# Altium PCB PCB design for light switch.PcbDoc
Units mm, origin at the board's own origin, x right, y up, seen from the top; angles counter-clockwise.
Board outline 81 x 35 mm, 2 copper layers (Top Layer, Bottom Layer); 18 components, 12 nets, 72 pads, 0 vias.
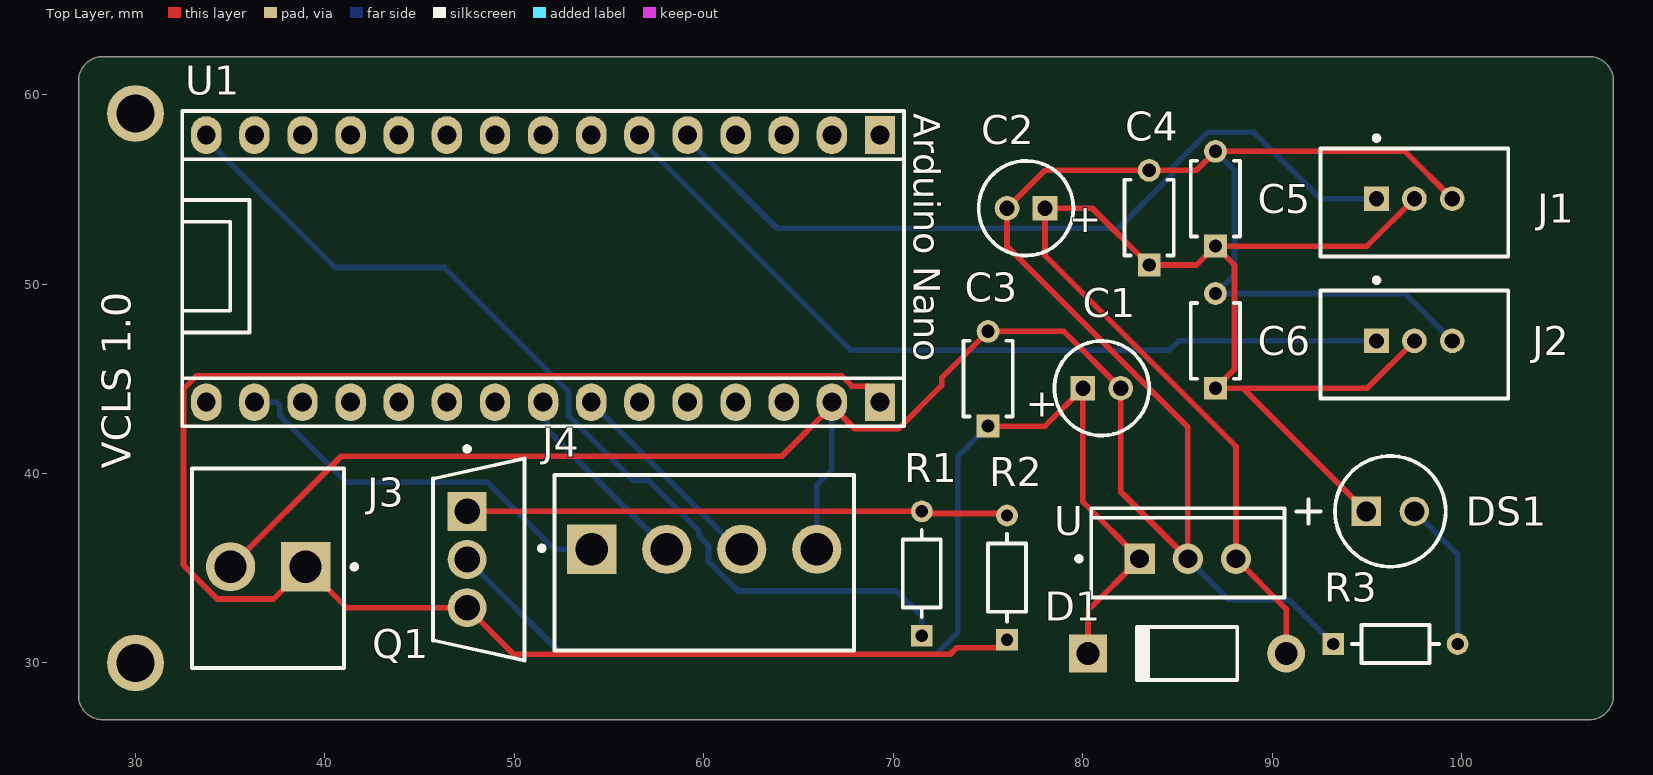
[diagram p0: Top Layer view]
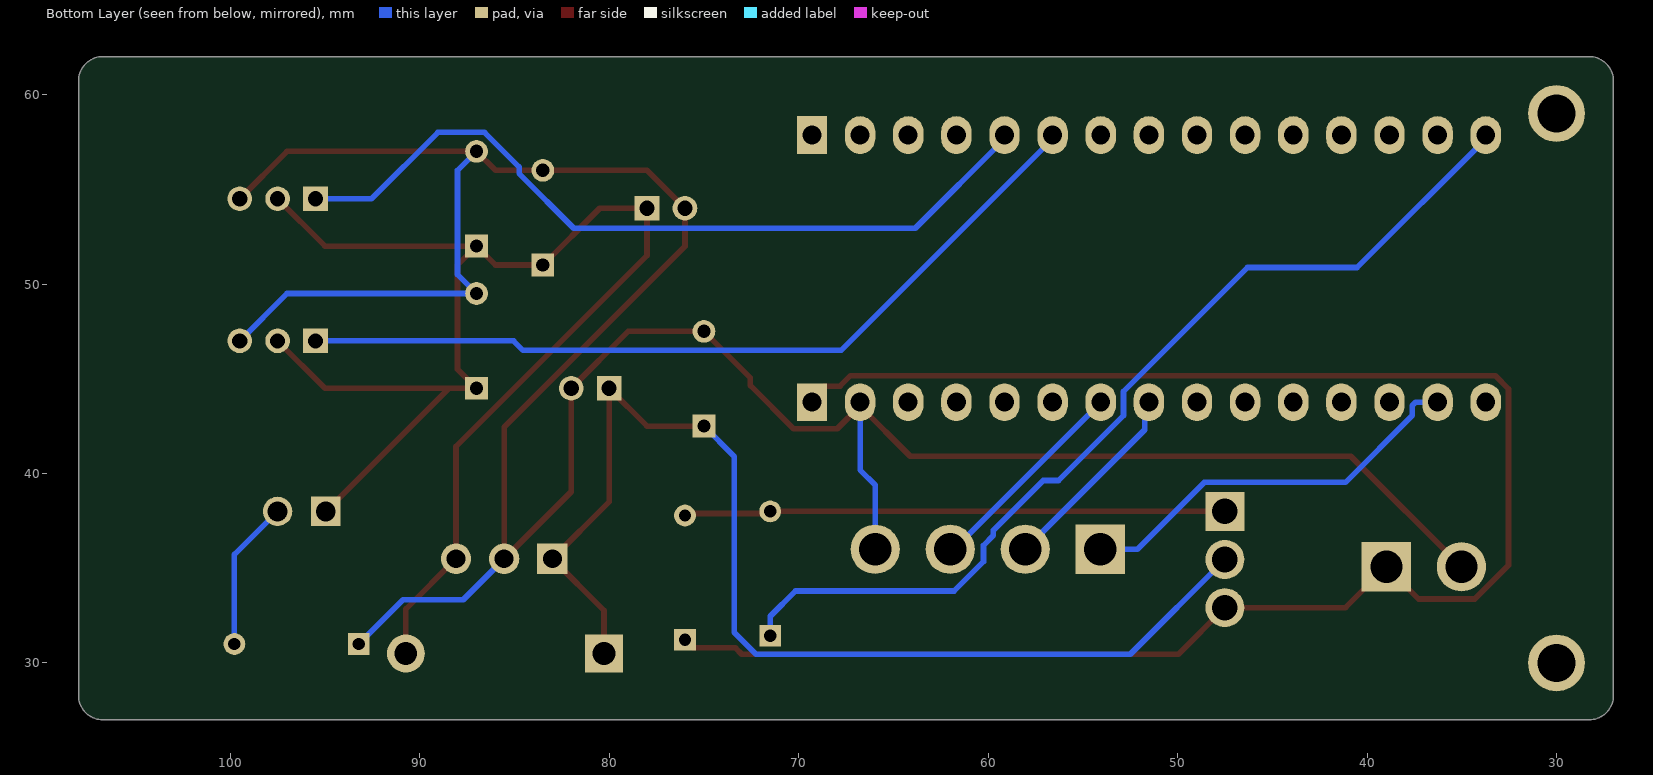
[diagram p1: Bottom Layer view, seen from below]
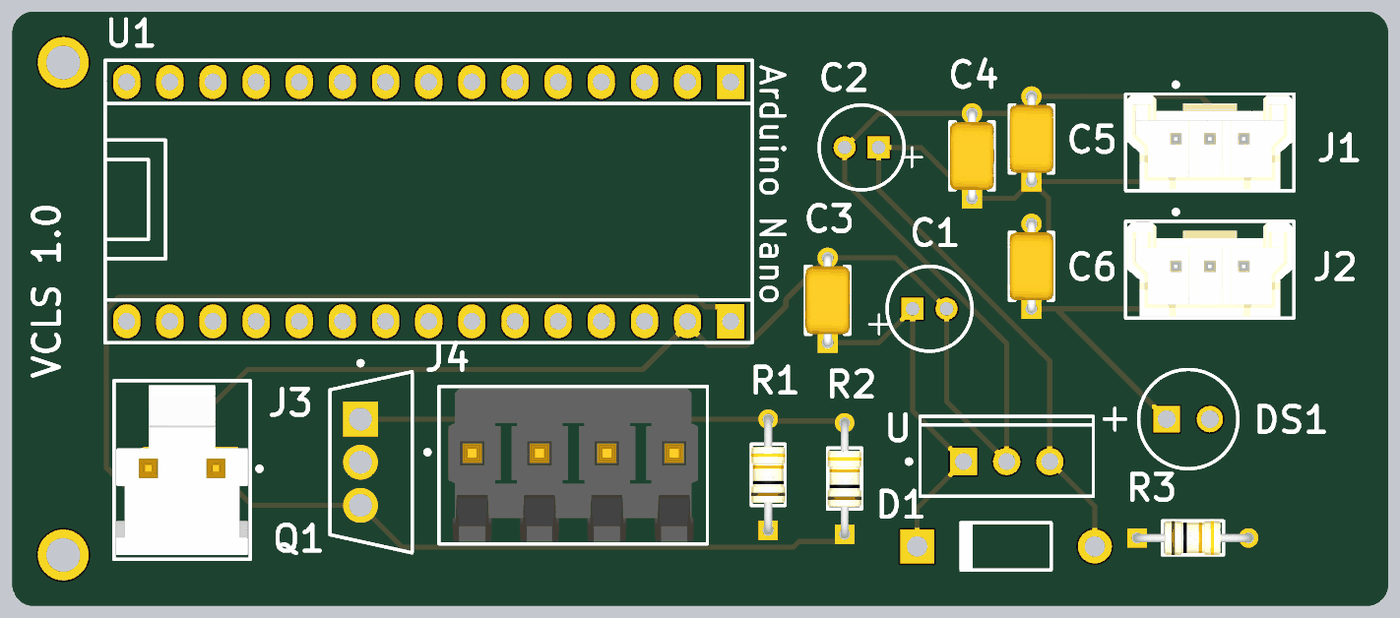
[diagram p2: 3D render of the assembled board from above, using the file's embedded part models]

## Layer stack, top to bottom
Top Solder: solder mask 0.0102, Solder Resist, Dk 3.5
Top Layer: signal copper 0.0356
Dielectric 1: dielectric 0.32, FR-4, Dk 4.8
Bottom Layer: signal copper 0.0356
Bottom Solder: solder mask 0.0102, Solder Resist, Dk 3.5

## Board outline
28.27,27 cw(c28.27,28.27) 27,28.27 27,60.73 cw(c28.27,60.73) 28.27,62 106.73,62 cw(c106.73,60.73) 108,60.73 108,28.27 cw(c106.73,28.27) 106.73,27

## Design rules (kind name [scope] priority, off if disabled: settings)
Clearance [All] p1: gap=0.254 ignorepadtopadclearanceinfootprint=FALSE except(0: Arc-Hole Track-Hole SMDPad-Hole THPad-Hole Via-Hole Fill-Hole Poly-Hole Region-Hole Text-Hole)
ComponentClearance [All] p1: gap=0.13 collisioncheckmode=3 verticalgap=0.13 showdistances=FALSE
PolygonConnect [All] p1: connectstyle=Relief reliefconductorwidth=0.254 reliefentries=4 polygonreliefangle="90 Angle" airgapwidth=0.254
RoutingVias [All] p1: holewidth=0.711 width=1.27 viastyle="Through Hole" minholewidth=0.711 minwidth=1.27 maxholewidth=0.711 maxwidth=1.27
SolderMaskExpansion [All] p1: expansion=0.102 istentingtop=FALSE
Width [All] p1: maxlimit=0.5 minlimit=0.25 preferedwidth=0.3
29 further rules are at their usual default settings.

## Components (designator, comment, footprint, x,y, rotation, side; value= is the part's Value field where it differs from the comment)
C1 "C10" CAPPR55-200-1100X500X1200 81,44.5 r0 top
C2 "C10" CAPPR55-200-1100X500X1200 77,54 r180 top
C3 "C0.1" FP-K15H5-MFG 75,45 r90 top
C4 "C0.1" FP-K15H5-MFG 83.5,53.5 r90 top
C5 "C0.1" FP-K15H5-MFG 87,54.5 r90 top
C6 "C0.1" FP-K15H5-MFG 87,47 r90 top
D1 "Diode 1N4007" DO-41 85.5,30.5 r180 top
DS1 "Led" AVAG-HLMP-3301-2 94.96,38 r0 top
J1 "35362-0350" FP-35362-0350-MFG 97.5,54.3 r180 top
J2 "35362-0350" FP-35362-0350-MFG 97.5,46.8 r180 top
J3 "26-61-4020" FP-26-61-4020-MFG 37,35 r0 top
J4 "26-48-1045" FP-26-48-1045-MFG 60.02,35.29 r180 top
Q1 "AUIRF9540N" FP-TO-220AB-MFG 48.12,35.46 r0 top
R1 "10k Ohm" FP-CF18-MFG 71.5,34.72 r90 top value=10kΩ
R2 "10K Ohm" FP-CF18-MFG 76,34.5 r90 top value=10kΩ
R3 "220 Ohm" FP-CF18-MFG 96.5,31 r0 top value=10kΩ
U "LM7806CT" FAIR-TO-220-3 85.54,35.5 r90 top
U1 "Arduino Nano" PCBComponent_1 50.5,51 r0 top

## Footprints (in the part's own frame and the unit in brackets; to place one, negate y for a bottom-side part, rotate by r counter-clockwise, add the part's x,y. Pads: shape width x height; smd on the part's side, far side on the other; paste and mask are expansions set on the pad)
AVAG-HLMP-3301-2 [mm] "THD, 2-Leads, Body Dia 5.85mm"
  rect 1.55x1.55 hole 1.05: 1(0,0)
  round 1.55 hole 1.05: 2(2.54,0)
  silkscreen extent -3.68,-2.92 4.19,2.92
CAPPR55-200-1100X500X1200 [mm] "THD, 2-Leads, Dia 5mm, Body Length 11mm"
  rect 1.3x1.3 hole 0.8: 1(-1,0)
  round 1.3 hole 0.8: 2(1,0)
  silkscreen extent -2.5,-2.5 2.5,2.5, body extent -2.5,-2.5 2.5,2.5, height 12
DO-41 [mm] "Diode, Axial; Body 5.2 x 2.7 mm (LxDia. max), Lead Dia. 0.86 mm (max)"
  round 2 hole 1.2: 1(-5.23,0)
  rect 2x2 hole 1.2: 2(5.23,0)
  silkscreen extent -2.65,-1.4 2.75,1.4
FAIR-TO-220-3 [mm] "FM, 3-Leads, Body 10.2x4.7mm, Pitch 2.54mm"
  rect 1.6x1.6 hole 1: 1(0,2.54)
  round 1.6 hole 1: 2(0,0) 3(0,-2.54)
  silkscreen extent -2.04,-5.1 2.66,5.87, body extent -2.04,-5.1 2.66,5.1, height 18.95
FP-26-48-1045-MFG [mm]
  rect 2.6x2.6 hole 1.7 paste-1000 mask+0: 1(5.94,-0.71)
  round 2.6 hole 1.7 paste-1000 mask+0: 2(1.98,-0.71) 3(-1.98,-0.71) 4(-5.94,-0.71)
  silkscreen extent -7.9,-4.63 8.7,4.63, body extent -8,-4.73 8,4.73, height 0.25
FP-26-61-4020-MFG [mm]
  rect 2.6x2.6 hole 1.7 paste-1000 mask+0: 1(1.98,0.075)
  round 2.6 hole 1.7 paste-1000 mask+0: 2(-1.98,0.075)
  silkscreen extent -4.01,-5.26 4.68,5.26, body extent -4.11,-5.36 4.11,5.36, height 0.25
FP-35362-0350-MFG [mm]
  rect 1.3x1.3 hole 0.8 paste-1000 mask+0: 1(2,-0.2)
  round 1.3 hole 0.8 paste-1000 mask+0: 2(0,-0.2) 3(-2,-0.2)
  silkscreen extent -4.95,-3.52 4.95,2.85, body extent -5.05,-2.95 5.05,2.95, height 0.25
FP-CF18-MFG [mm]
  rect 1.15x1.15 hole 0.65 paste-1000 mask+0: 1(-3.28,0)
  round 1.15 hole 0.65 paste-1000 mask+0: 2(3.28,0)
  silkscreen extent -2.3,-1 2.3,1, body extent -3.96,-1.1 3.96,1.1, height 0.25
FP-K15H5-MFG [mm]
  rect 1.2x1.2 hole 0.7 paste-1000 mask+0: 1(-2.5,0)
  round 1.2 hole 0.7 paste-1000 mask+0: 2(2.5,0)
  silkscreen extent -2,-1.3 2,1.3, body extent -3.2,-1.4 3.2,1.4, height 0.25
FP-TO-220AB-MFG [mm]
  rect 2.05x2.05 hole 1.35 paste-1000 mask+0: 1(-0.62,2.54)
  round 2.05 hole 1.35 paste-1000 mask+0: 2(-0.62,0) 3(-0.62,-2.54)
  silkscreen extent -2.41,-5.34 2.41,5.96
PCBComponent_1 [mm]
  rect 1.6x2 hole 1: 1(18.796,6.858) 30(18.796,-7.239)
  oval 1.6x2 hole 1: 2(16.256,6.858) 3(13.716,6.858) 4(11.176,6.858) 5(8.636,6.858) 6(6.096,6.858) 7(3.556,6.858) 8(1.016,6.858) 9(-1.524,6.858) 10(-4.064,6.858) 11(-6.604,6.858) 12(-9.144,6.858) 13(-11.684,6.858) 14(-14.224,6.858) 15(-16.764,6.858) 16(-16.764,-7.239) 17(-14.224,-7.239) 18(-11.684,-7.239) 19(-9.144,-7.239) 20(-6.604,-7.239) 21(-4.064,-7.239) 22(-1.524,-7.239) 23(1.016,-7.239) 24(3.556,-7.239) 25(6.096,-7.239) 26(8.636,-7.239) 27(11.176,-7.239) 28(13.716,-7.239) 29(16.256,-7.239)
  silkscreen extent -18.03,-8.51 20.07,8.13

## Part data
C1 C2: library part CMP-1665-00038-2, "Aluminum Electrolytic Capacitor, 10 uF, +/- 20%, 50 V, -40 to 85 degC, 2-Pin THD, RoHS, Bulk", Capacitance=10uF, Case/Package=Radial, Dielectric Material=Aluminium, Leakage Current=3uA, Manufacturer=Panasonic, Max Operating Temperature=85degC, Min Operating Temperature=-40degC, Package Description="2-Pin Radial Lead, Dia 5 mm, Height 12 mm", Package Quantity=200, Package Reference=CAPPR55-200-1100X500X1200, Ripple Current=65mA, Tolerance=20%, Voltage=50V, Datasheet URL=https://industrial.panasonic.com/cdbs/www-data/pdf/RDF0000/ABA0000C1218.pdf, Datasheet Version="Rev. 05, 10/2016", Diameter=5mm, Dissipation Factor=0.12%, Height=11mm, Height - Seated (Max)=0.472inch, Lead Diameter=0.5mm, Lead Free=LeadFree, Lead Pitch=2mm, Lead/Base Style=Straight, Length=11mm, Life (Hours)=2000Hour, Manufacturer URL=http://www.panasonic.com/, Mount=ThroughHole, Number of Pins=2, Packaging=Bulk, Radiation Hardening=No, REACH SVHC=NoSVHC, Ripple Current (AC)=65mA, RoHSCompliant=true, Termination=Radial, Voltage Rating=50V, Voltage Rating (DC)=50V
C3 C4 C5 C6: library part CMP-02417-000078-1, "CAP CER 0.1UF 50V X7R RADIAL", Capacitance=100nF, Case/Package=Dipped, Dielectric=X7R, Dielectric Material=Ceramic, Max Operating Temperature=125°C, Min Operating Temperature=-55°C, Package Quantity=1, Tolerance=10%, Voltage=50V, Construction=RADIAL, Depth=2.5mm, Diameter=500um, Height=4mm, Height - Seated (Max)=0.257inch, Lead Diameter=0.5mm, Lead Free="Lead Free", Lead Length=30mm, Lead Pitch=5mm, Lead/Base Style="Formed Leads", Length=4mm, Mount="Through Hole", Packaging="Tape and Reel", Radiation Hardening=No, RoHS Compliant=Yes, Series=K, Termination=Radial, Thickness=2.6mm, Voltage Rating=50V, Voltage Rating (DC)=50V, Weight=0.005644oz, Width=2.5mm
D1: "1 Amp General Purpose Rectifier", Code_JEDEC=DO-204-AL, ComponentLink1Description="Manufacturer Link", ComponentLink1URL=http://www.fairchildsemi.com/, ComponentLink2Description=Datasheet, ComponentLink2URL=http://www.fairchildsemi.com/ds/1N%2F1N4001.pdf, DatasheetVersion=1998, LatestRevisionDate=17-Jul-2002, LatestRevisionNote="Re-released for DXP Platform.", PackageDescription="Diode, Axial; Body 5.2 x 2.7 mm (LxDia. max), Lead Dia. 0.86 mm (max)", PackageReference=DO-41, PackageVersion=Aug-1999, Published=8-Jun-2000, Publisher="Altium Limited"
DS1: library part CMP-2000-06411-1, "T-1 3/4 (5 mm) Diffused LED Lamp, 1.9 V, -40 to 100 degC, 2-Pin THD, RoHS, Bulk", Emitting Color=Red, Forward Current=25mA, Forward Voltage=2.4V, Manufacturer=Avago, Operating Temp Range=-40Cto100C, Operating Temperature Classification=Industrial, Package Description="2-Pin Through Hole LED, Dia 5.85 mm", Package Reference=HLMP-3301, Package Type=T-13/4, Power Dissipation=85W, Reverse Voltage=5V, Test Current (It)=10mA, Chip Material=GaP, Datasheet URL=http://www.avagotech.com/docs/AV02-1558EN, Datasheet Version=03/2015, DELETED=Compliant, Dominant Wave Length=626nm, High Brightness=No, Lens Dimensions=5.08x5.08x8.3mm, Lens Type=ColoredDiffused, Lum Intensity=5.4mcd, Luminous Intensity=5.4mcd, Main Category=StandardLED, Manufacturer URL=http://www.avagotech.com/, Mounting=ThroughHole, Mounting Technology=ThroughHole, Number of  Elements=1, Packaging=TapeandReel, Peak Wavelength=635nm, Pin Count=2, Product Depth (mm)=6.1mm, Product Height (mm)=9.19mm, Product Length (mm)=6.1mm, Rad Hardened=No, Shape Type=Circular, Type=Uni-Color, Viewing Angle=60deg
J1 J2: library part CMP-04776-000519-1, "CONN HEADER VERT 3POS 2MM", Case/Package=0350, Color=Natural, Contact Resistance=20mR, Current Rating=2A, Flammability Rating="UL94 V-0", Insulation Resistance=1GR, Max Operating Temperature=105°C, Max Voltage Rating (DC)=125.125kV, Min Operating Temperature=-40°C, Package Quantity=1000, Voltage Rating=125V, Contact Material=Brass, Contact Plating=Tin, Depth=2.3mm, Gender=Male, Glow Wire Compliant=Non-compliant, Halogen Free="Low Halogen", Height=2.3mm, Housing Color=Natural, Housing Material=Nylon, Lead Free="Lead Free", Lead Pitch=2mm, Length=14.7mm, Max Current Rating=2A, Mount="Through Hole", Number of Circuits=3, Number of Contacts=3, Number of Positions=3, Number of Rows=1, Orientation=Vertical, Packaging=Bulk, Pitch=2mm, Radiation Hardening=No, Series=SHERLOCK, Termination=Solder, Voltage Rating (AC)=125V, Voltage Rating (DC)=125V, Width=10.3mm
J3: library part CMP-00257-00277943-1, "26-61-4020 3.96mm (.156\") Pitch KK® Solid Header, Vertical, Friction Lock, 2 Circuits, Gold (Au) Plating", Color=Natural, Contact Resistance=6mΩ, Current Rating=7A, Flammability Rating="UL94 V-0", Insulation Resistance=50GΩ, Manufacturer Lifecycle Status=ACTIVE, Max Operating Temperature=75°C, Max Voltage Rating (AC)=250V, Min Operating Temperature=0°C, Contact Material=Brass, Contact Plating=Gold, Country of Origin=US, Depth=10.01mm, Gender=Male, Glow Wire Compliant=Non-compliant, Height=14.73mm, Housing Color=Natural, Housing Material=Polyester, Lead Free="Lead Free", Lead Pitch=3.96mm, Length=7.77mm, Lifecycle Status=Production, Max Current Rating=7A, Mount="Through Hole", NexarPartId=277943, Number of Circuits=2, Number of Contacts=2, Number of Positions=2, Number of Rows=1, Orientation="Right Angle, Vertical", Packaging=Bulk, Pitch=3.96mm, Radiation Hardening=No, REACH SVHC=Unknown, RoHS=Compliant, Schedule B=8536694040, Termination=Solder, Voltage Rating=250V, Voltage Rating (DC)=250V
J4: library part CMP-00257-00006898-1, "26-48-1045 KK 396 Breakaway Header Vertical Square Pin with Friction Lock 4 Circuits Tin (Sn) Plating", Color=Black, Contact Resistance=10mΩ, Current Rating=7A, Flammability Rating="UL94 V-0", Manufacturer Lifecycle Status=ACTIVE, Max Operating Temperature=75°C, Min Operating Temperature=0°C, Voltage Rating=250V, Approvals="CSA, TUV, UL", Contact Material=Brass, Contact Plating=Tin, Country of Origin=PR, Gender=Male, Glow Wire Compliant=Non-compliant, Height=15.31mm, Housing Color=Black, Housing Material=Polyester, Lead Free="Lead Free", Lead Pitch=3.96mm, Lifecycle Status=Production, Mount="Through Hole", NexarPartId=6898, Number of Circuits=4, Number of Contacts=4, Number of Positions=4, Number of Rows=1, Orientation="Right Angle, Vertical", Pitch=3.96mm, Radiation Hardening=No, RoHS=Compliant, Schedule B=8536694040, Termination=Solder, Voltage Rating (AC)=250V, Voltage Rating (DC)=250V
Q1: library part CMP-00196-74197148-1, "AUIRF9540N Automotive Q101 -100V Single P-Channel HEXFET Power MOSFET in a TO-220AB Package", Case/Package=TO-220AB, Continuous Drain Current (ID)=-23A, Drain to Source Breakdown Voltage=-100V, Drain to Source Resistance=117mΩ, Gate to Source Voltage (Vgs)=20V, Input Capacitance=1.3nF, Max Junction Temperature (Tj)=175°C, Max Power Dissipation=140W, Min Operating Temperature=-55°C, Package Quantity=1000, Threshold Voltage=-2V, Drain to Source Voltage (Vdss)=-100V, Fall Time=51ns, Height=16.51mm, Length=10.66mm, Lifecycle Status=Obsolete, Max Operating Temperature=175°C, Mount="Through Hole", NexarPartId=74197148, Number of Elements=1, Number of Pins=3, On-State Resistance=117mΩ, Power Dissipation=140W, Radiation Hardening=No, REACH SVHC="No SVHC", Rise Time=67ns, RoHS=Compliant, Turn-Off Delay Time=51ns, Turn-On Delay Time=15ns, Width=4.82mm
R1 R2 R3: library part CMP-26528-000002-1, "RES 10K OHM 1/8W 5% CF AXIAL", Manufacturer="Stackpole Electronics", Manufacturer Part Number=CF18JT10K0, Package=CF18, Power Rating=0.125W, Resistance=10kΩ, Temperature="-55°C to +155°C", Temperature Coefficient=0-500ppm/°C, Temperature Range High=+155°C, Temperature Range Low=-55°C, Tolerance=5%, Voltage Rating=250V, Automotive=No, Category=Res, ComponentLink2Description=Datasheet, ComponentLink2URL=http://www.seielect.com/Catalog/SEI-CF_CFM.pdf, Composition="Carbon Film", Device Class L1="Passive Components", Device Class L2=Resistors, Device Class L3="Through-Hole Resistors", Digikey Description="RES 10K OHM 1/8W 5% CF AXIAL", Height=2mm, Ipc Land Pattern Name=RESAD656W65L360D200, Lead Free=Yes, Octopart=https://octopart.com/cf18jt10k0-stackpole+electronics-19205642, RoHS=TRUE, Series=CF
U: library part CMP-2000-04938-1, "Positive Voltage Regulator, 5 V, 1 A, -40 to 125 degC, 3-Pin TO-220, RoHS, Tube", Manufacturer=FairchildSemiconductor, Maximum Input Voltage=35V, Maximum Output Current=2.2(Typ)A, Maximum Quiescent Current=8mA, Operating Temperature=-40to125degC, Output Voltage=5V, Package=3TO-220AB, Package Description="3-Pin Through Hole Device, Body 10 x 4.5 mm, Pitch 2.54 mm", Package Reference=TO-220, Typical Dropout Voltage @ Current=2@1AV, Accuracy=±4%, Category=LinearRegulator, Datasheet URL=https://datasheet.ciiva.com/26904/lm7805ct-26904988.pdf, Datasheet Version=Aug-12, Line Regulation=100mV, Load Regulation=100mV, Manufacturer URL=https://www.fairchildsemi.com/, Mounting=ThroughHole, Number of Outputs=1, Output Type=Fixed, Package URL=https://www.fairchildsemi.com/package-drawings/TO/TO220B03.pdf, Packaging=Rail/Tube, Polarity=Positive, Rad Hard=No, Type=Linear
U1: library part Component_1

## Free pads (board coordinates)
  round 3 hole 2: 7(30,59) 8(30,30)

## Nets (pads, with @x,y where several pads share a name; then routed paths per layer and width w, separated by ;. In a path a pad name is that pad's centre, name@x,y a point inside that pad or via, vN(x,y) a via of type N, cw(c..) or ccw(c..) an arc to the next point about the centre after c; other vN are vias at no path point)
NetC1_1: C1.1 C3.1 D1.2 Q1.2 U.1 | length 62.5
  Top Layer w0.3: C3.1 78,42.5 C1.1 80,38.5 U.1 80.27,32.77 D1.2 D1.2@80,30.5
  Bottom Layer w0.3: Q1.2 52.499,30.461 72.242,30.461 73.396,31.615 73.396,40.896 C3.1
NetC1_2: C1.2 C2.2 C3.2 C4.2 C5.2 C6.2 J1.3 J2.3 J3.2 J4.4 R3.1 U1.29 U.2 | length 153.4
  Top Layer w0.3: J3.2 40.859,40.914 64.109,40.914 U1.29@66.756,43.561 ; U1.29 U1.29@66.756,43.561 ; J1.3 97,57 C5.2 86,56 C4.2 78,56 C2.2 76,51.991 85.54,42.451 U.2 82,39.04 C1.2 79,47.5 C3.2 72.546,45.046 72.546,44.639 70.263,42.357 67.96,42.357 U1.29@66.756,43.561
  Bottom Layer w0.3: J4.4 65.96,39.393 66.756,40.189 U1.29 U1.29@66.608,43.613 ; J4.4@66.46,35.5 J4.4@66.608,35.648 ; U.2 87.702,33.338 90.882,33.338 R3.1 ; C5.2 88.004,55.996 88.004,50.504 C6.2 97,49.5 J2.3
NetC2_1: C2.1 C4.1 C5.1 C6.1 D1.1 DS1.1 J1.2 J2.2 U.3 | length 80
  Top Layer w0.3: D1.1 90.73,32.85 U.3 88.08,41.42 78,51.5 C2.1 80.5,54 C4.1 86,51 C5.1 ; DS1.1 88.46,44.5 ; J2.2 95,44.5 88.46,44.5 ; J1.2 95,52 C5.1 ; C5.1 88.004,50.996 88.004,45.504 C6.1 88.46,44.5
NetDS1_2: DS1.2 R3.2 | length 7.9
  Bottom Layer w0.3: DS1.2 99.78,35.72 R3.2
NetJ1_1: J1.1 U1.5 | length 42.3
  Bottom Layer w0.3: U1.5 59.136,57.658 63.848,52.946 81.866,52.946 84.752,55.832 84.752,56.172 86.584,58.004 89.04,58.004 92.544,54.5 J1.1
NetJ2_1: J2.1 U1.6 | length 43.9
  Bottom Layer w0.3: U1.6 56.596,57.658 67.758,46.496 84.54,46.496 85.044,47 J2.1
NetJ3_1: J3.1 Q1.3 R2.1 U1.30 | length 94.2
  Top Layer w0.3: U1.30 69.296,43.961 68.646,44.611 67.809,44.611 67.255,45.165 33.237,45.165 32.532,44.46 32.532,35.153 34.314,33.371 37.276,33.371 J3.1 41.135,32.92 Q1.3 49.959,30.461 72.999,30.461 73.333,30.795 75.575,30.795 R2.1
NetJ4_1: J4.1 U1.17 | length 21.5
  Bottom Layer w0.3: U1.17@36.276,43.561 U1.17 37.436,43.761 37.612,43.585 37.612,43.062 41.143,39.531 48.59,39.531 52.121,36 J4.1
NetJ4_2: J4.2 U1.23 | length 10.5
  Bottom Layer w0.3: U1.23 51.729,43.548 51.729,42.311 J4.2
NetJ4_3: J4.3 U1.24 | length 11.4
  Bottom Layer w0.3: U1.24 54.056,43.753 61.809,36 J4.3 ; J4.3@62.309,35.5 J4.3@62.5,35.5
NetQ1_1: Q1.1 R1.2 R2.2 | length 28.6
  Top Layer w0.3: Q1.1 R1.2 71.61,37.89 75.89,37.89 R2.2
NetR1_1: R1.1 U1.15 | length 50.8
  Bottom Layer w0.3: U1.15 33.736,57.658 40.526,50.868 46.311,50.868 52.852,44.328 52.852,43.062 56.28,39.634 57.086,39.634 59.724,36.996 59.724,36.726 60.244,36.206 60.244,35.346 61.794,33.796 70.169,33.796 71.5,32.465 R1.1
pads on no net: U1.1 U1.2 U1.3 U1.4 U1.7 U1.8 U1.9 U1.10 U1.11 U1.12 U1.13 U1.14 U1.16 U1.18 U1.19 U1.20 U1.21 U1.22 U1.25 U1.26 U1.27 U1.28

## Silkscreen, mask and mechanical layers (free items; w line width, h text height)
Top Overlay:
  text "VCLS 1.0" at 29.746,40.254 h1.52 r90
Mechanical 1:
  lines w0.254: 27,28.27 ccw(c28.27,28.27) 28.27,27 33,27 103,27 106.73,27 ccw(c106.73,28.27) 108,28.27 108,60.73 ccw(c106.73,60.73) 106.73,62 28.27,62 ccw(c28.27,60.73) 27,60.73 27,28.27

## Text inside footprints (layer, text, board x,y; h text height)
C1: Top Overlay "+" at 77,43 h1.5
C2: Top Overlay "+" at 81,54 h1.5 r180